# Altium PCB PCB1.PcbDoc
Units mil, origin at the board's own origin, x right, y up, seen from the top; angles counter-clockwise.
Board outline 6000 x 4000 mil, 2 copper layers (Top Layer, Bottom Layer); 32 components, 17 nets, 94 pads, 8 vias.
Unrouted connection lines stored in the file: 46.
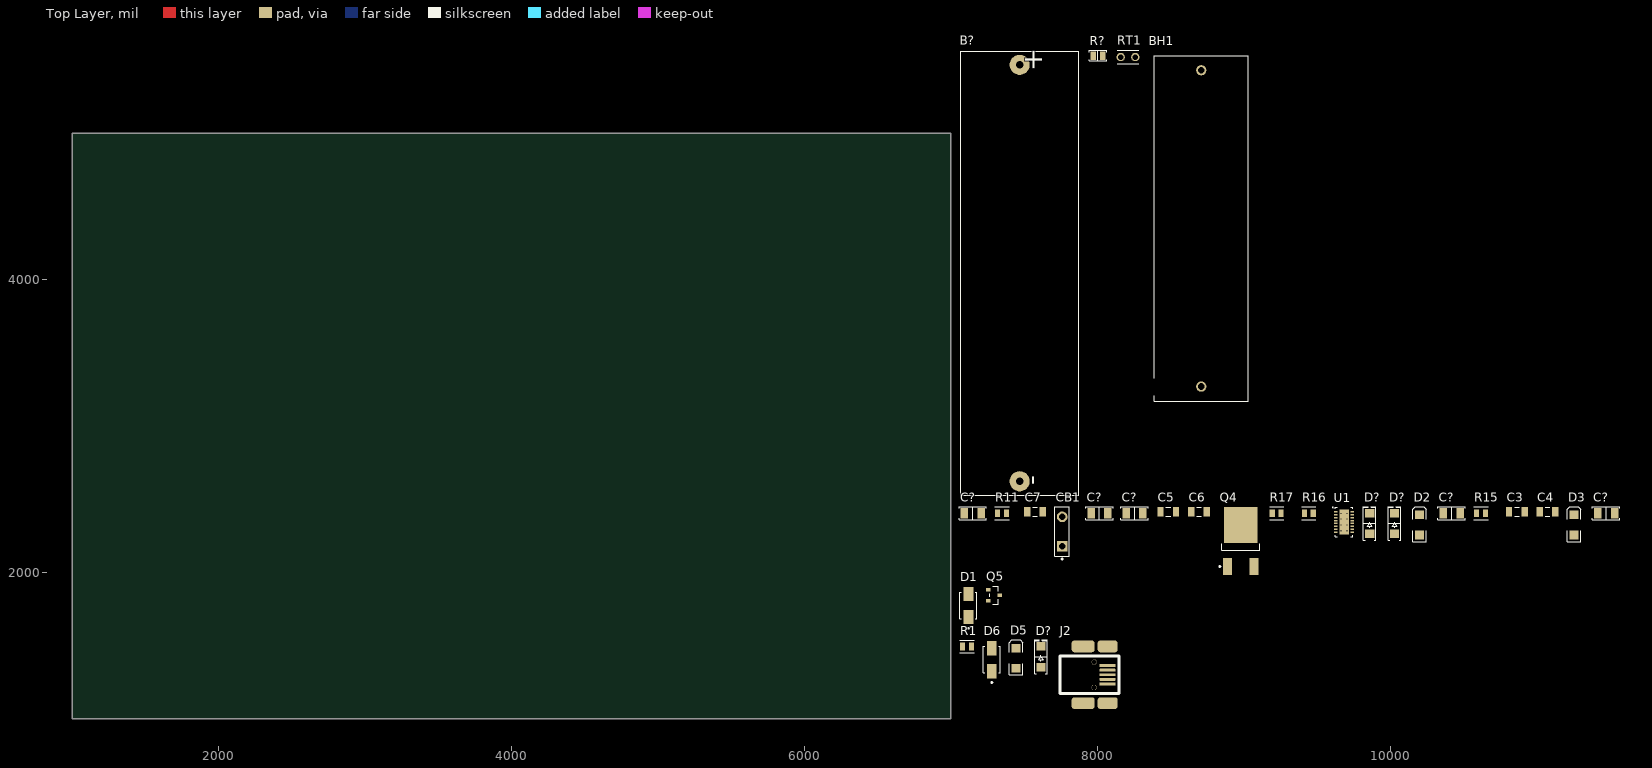
[diagram p0: Top Layer view]
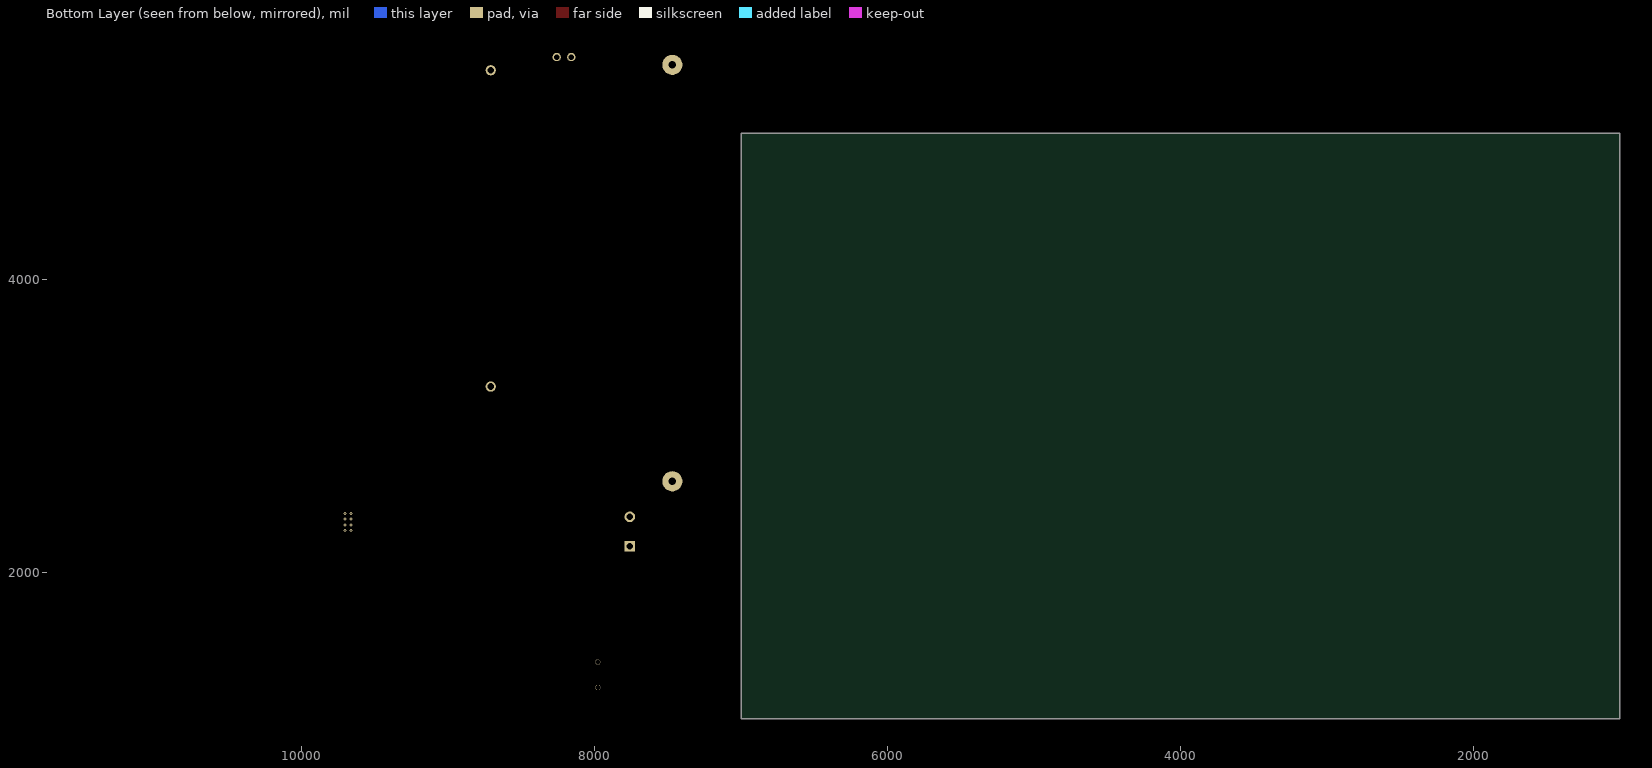
[diagram p1: Bottom Layer view, seen from below]

## Layer stack, top to bottom
Top Solder: solder mask 0.4, Solder Resist, Dk 3.5
Top Layer: signal copper 1.4
Dielectric 1: dielectric 12.6, FR-4, Dk 4.8
Bottom Layer: signal copper 1.4
Bottom Solder: solder mask 0.4, Solder Resist, Dk 3.5

## Board outline
1000,1000 7000,1000 7000,5000 1000,5000

## Design rules (kind name [scope] priority, off if disabled: settings)
Clearance [All] p1: gap=10 ignorepadtopadclearanceinfootprint=FALSE except(0: Arc-Hole Track-Hole SMDPad-Hole THPad-Hole Via-Hole Fill-Hole Poly-Hole Region-Hole Text-Hole)
PolygonConnect [All] p1: connectstyle=Relief reliefconductorwidth=10 reliefentries=4 polygonreliefangle="90 Angle" airgapwidth=10
RoomDefinition Блок4 [InComponentClass('Блок4')] p1: confinementstyle=ConfineIn formatcopy=TRUE lockcomponents=FALSE outline 0,0 2000,0 2000,1000 0,1000
RoomDefinition Блок3 [InComponentClass('Блок3')] p2: confinementstyle=ConfineIn formatcopy=TRUE lockcomponents=FALSE outline 0,0 2000,0 2000,1000 0,1000
RoomDefinition Блок2 [InComponentClass('Блок2')] p3: confinementstyle=ConfineIn formatcopy=TRUE lockcomponents=FALSE outline 0,0 2000,0 2000,1000 0,1000
RoomDefinition Блок1 [InComponentClass('Блок1')] p4: confinementstyle=ConfineIn formatcopy=TRUE lockcomponents=FALSE outline 0,0 2000,0 2000,1000 0,1000
RoutingVias [All] p1: holewidth=28 width=50 viastyle="Through Hole" minholewidth=28 minwidth=50 maxholewidth=28 maxwidth=50
SolderMaskExpansion [All] p1: expansion=4 istentingtop=FALSE
Width [All] p1: maxlimit=10 minlimit=10 preferedwidth=10
30 further rules are at their usual default settings.

## Classes and differential pairs
component class Блок4: B? BH1 R? RT1
component class Блок3: C3 C4 C5 C6 C7 C? CB1 D2 D3 D? Q4 R11 R15 R16 R17 U1
component class Блок2: D1 PTC1 Q5
component class Блок1: D5 D6 D? J2 R1

## Components (designator, comment, footprint, x,y, rotation, side; value= is the part's Value field where it differs from the comment)
B? "1043" "KEYSTONE 1043" 7470,4045 r90 top
BH1 "1028" 1028 8710,3270 r90 top
C3 "Cap Semi" C1206 10865,2415 r0 top value=1uF
C4 "Cap Semi" C1206 11075,2415 r0 top value=1uF
C5 "Cap Semi" C1206 8485,2415 r0 top value=10uF
C6 "Cap Semi" C1206 8695,2415 r0 top value=10uF
C7 "Cap Semi" C1206 7575,2415 r0 top value=560pF
C? "1µF" "CAP 1206_3216 - 1.2MM" 11475,2405 r0 top
C? "560pF" "CAP 1206_3216 - 0.8MM" 7150,2405 r0 top
C? "10µF" "CAP 1206_3216 - 1.0MM" 8255,2405 r0 top
C? "1µF" "CAP 1206_3216 - 1.2MM" 10420,2405 r0 top
C? "10µF" "CAP 1206_3216 - 1.0MM" 8015,2405 r0 top
CB1 "Circuit Breaker" SPST-2 7760,2280 r90 top
D1 "SMAJ9.0A-13-F" FP-SMA-MFG 7120,1775 r90 top
D2 "LED2" 3.2X1.6X1.1 10200,2325 r90 top
D3 "LED2" 3.2X1.6X1.1 11255,2325 r90 top
D5 "LED2" 3.2X1.6X1.1 7445,1415 r90 top
D6 "SMAJ9.0A-13-F" FP-SMA-MFG 7280,1405 r90 top
D? "Green" "LED 1206_3216 GREEN" 7615,1425 r90 top
D? "Blue" "LED 1206_3216 BLUE" 9860,2335 r90 top
D? "Yellow" "LED 1206_3216 YELLOW" 10030,2335 r90 top
J2 "67503-1020" MOLX-67503-1020_V 8070,1365 r0 top
Q4 "MJD210T4G" ONSC-DPAK-3-369C-01_V 8980,2215 r90 top
Q5 "SI2333CDS-T1-GE3" FP-S-03946-MFG 7295,1845 r0 top
R1 "MC01W0805110K" FP-MC01W0805-IPC_C 7110,1495 r0 top
R11 "MC01W0805110K" FP-MC01W0805-IPC_C 7350,2405 r0 top
R15 "MC01W0805110K" FP-MC01W0805-IPC_C 10620,2405 r0 top
R16 "MC01W0805110K" FP-MC01W0805-IPC_C 9445,2405 r0 top
R17 "MC01W0805110K" FP-MC01W0805-IPC_C 9225,2405 r0 top
R? "10k" "NTC 0805_2012" 8005,5530 r0 top
RT1 "103AT-2" SEMI-103AT-2_V 8210,5520 r0 top
U1 "LTC4060EDHC#PBF" LT-DHC-16_V 9685,2345 r0 top

## Footprints (in the part's own frame and the unit in brackets; to place one, negate y for a bottom-side part, rotate by r counter-clockwise, add the part's x,y. Pads: shape width x height; smd on the part's side, far side on the other; paste and mask are expansions set on the pad)
3.2X1.6X1.1 [mm] "SMT LED; 2 Flat Leads"
  rect 1.5x1.5 smd: 1(-1.75,0) 2(1.75,0)
  silkscreen extent -2.9,-1.15 3.2,1.15
1028 [mm]
  round 1.785 hole 1.19: 1(0,0) 2(54.86,0)
  round 1.19 hole 2.38 unplated: 3(0,7.09)
  silkscreen extent -2.54,-8.13 57.4,8.13, body extent -1.71,-8.25 57.21,8.26, height 20.12
C1206 [mm] "Chip Capacitor, Body 3.2x1.6mm, IPC High Density"
  rect 1.1x1.7 smd: 1(-1.35,0) 2(1.35,0)
  silkscreen extent -0.4,-0.75 0.4,0.75, body extent -1.7,-0.9 1.7,0.9, height 1.3
"CAP 1206_3216 - 0.8MM" [mm] "Chip Capacitor, 2-Leads, Body 3.25x1.60mm, IPC Medium Density"
  rect 1.3x1.8 smd: 1(-1.45,0) 2(1.45,0)
  silkscreen extent -2.37,-1.12 2.37,1.12, body extent -1.6,-0.8 1.6,0.8, height 0.8
"CAP 1206_3216 - 1.0MM" [mm] "Chip Capacitor, 2-Leads, Body 3.25x1.60mm, IPC Medium Density"
  rect 1.3x1.8 smd: 1(-1.45,0) 2(1.45,0)
  silkscreen extent -2.37,-1.12 2.37,1.12, body extent -1.6,-0.8 1.6,0.8, height 1
"CAP 1206_3216 - 1.2MM" [mm] "Chip Capacitor, 2-Leads, Body 3.25x1.60mm, IPC Medium Density"
  rect 1.3x1.8 smd: 1(-1.45,0) 2(1.45,0)
  silkscreen extent -2.37,-1.12 2.37,1.12, body extent -1.6,-0.8 1.6,0.8, height 1.2
FP-MC01W0805-IPC_C [mil]
  rect 35.67x51.8 smd paste+0 mask+0: 1(-30.55,0) 2(30.55,0)
  silkscreen extent -48,-43 48,43, body extent -52,-31 52,31, height 10
FP-S-03946-MFG [mil]
  rect 29x22 smd paste+0 mask+0: 1(-39,37.5) 2(-39,-37.5) 3(39,0)
  silkscreen extent -28,-60 28,60, body extent -57,-64 57,64, height 10
FP-SMA-MFG [mm]
  rect 2.5x1.7 smd paste+0 mask+0: 1(-2,0) 2(2,0)
  silkscreen extent -4.07,-1.46 2.3,1.46, body extent -3.35,-1.56 3.35,1.56, height 0.25
"KEYSTONE 1043" [mm]
  round 3.5 hole 1.32 unplated: 1(36.11,0) 2(-36.11,0)
  rect 0x0 hole 3.55 unplated: M(-27.6,-7.87) M(27.6,7.87)
  rect 0x0 hole 2.39 unplated: M(36.11,-7.87)
  silkscreen extent -38.5,-10.25 38.5,10.25, body extent -38.53,-10.32 38.53,10.33, height 14.86
"LED 1206_3216 BLUE" [mm] "Chip Diode, 2-Leads, Body 3.13x1.55mm, IPC Medium Density"
  rect 1.5x1.6 smd: 1(-1.8,0) 2(1.8,0)
  silkscreen extent -2.92,-1.1 2.92,1.1, body extent -1.6,-0.8 1.6,0.8, height 0.9
"LED 1206_3216 GREEN" [mm] "Chip Diode, 2-Leads, Body 3.13x1.55mm, IPC Medium Density"
  rect 1.5x1.6 smd: 1(-1.8,0) 2(1.8,0)
  silkscreen extent -2.92,-1.1 2.92,1.1, body extent -1.6,-0.8 1.6,0.8, height 0.9
"LED 1206_3216 YELLOW" [mm] "Chip Diode, 2-Leads, Body 3.13x1.55mm, IPC Medium Density"
  rect 1.5x1.6 smd: 1(-1.8,0) 2(1.8,0)
  silkscreen extent -2.92,-1.1 2.92,1.1, body extent -1.6,-0.8 1.6,0.8, height 0.9
LT-DHC-16_V [mm] "SON, 16-Leads, Body 5x3mm, Pitch 0.5mm, Thermal Pad 4.4X1.65mm"
  rect 0.65x0.25 smd: 1(-1.425,1.75) 2(-1.425,1.25) 3(-1.425,0.75) 4(-1.425,0.25) 5(-1.425,-0.25) 6(-1.425,-0.75) 7(-1.425,-1.25) 8(-1.425,-1.75) 9(1.425,-1.75) 10(1.425,-1.25) 11(1.425,-0.75) 12(1.425,-0.25) 13(1.425,0.25) 14(1.425,0.75) 15(1.425,1.25) 16(1.425,1.75)
  rect 1.65x4.4 smd: 17(0,0)
  silkscreen extent -2,-2.55 1.55,2.6, body extent -1.5,-2.5 1.5,2.5, height 0.8
MOLX-67503-1020_V [mm] "Mini USB Connector, SMT, Righer Angle"
  rrect50% 2.8x0.5 smd: 1(0,0) 2(0,-0.8) 3(0,-1.6) 4(0,-2.4) 5(0,-3.2)
  rrect50% 3.5x2.05 smd: 6(0.025,3.325) 8(0.025,-6.525)
  rrect50% 4x2.05 smd: 7(-4.225,3.325) 9(-4.225,-6.525)
  round 0.9 hole 0.9 unplated: X(-2.325,-3.8) Y(-2.325,0.6)
  silkscreen extent -8.25,-4.85 2,1.65, body extent -8.22,-6.56 0.78,3.34, height 3.95
"NTC 0805_2012" [mm] "Chip Thermistor, 2-Leads, Body 2.00x1.25mm, IPC Medium Density"
  rect 1x1.45 smd: 1(-0.825,0) 2(0.825,0)
  silkscreen extent -1.5,-0.9 1.5,0.9, body extent -1,-0.64 1,0.64, height 1.27
ONSC-DPAK-3-369C-01_V [mm] "DPAK, 3-Leads, Body 6.54x6.095mm, Pitch 2.29mm"
  rect 3x1.6 smd: 1(-4.4,2.29) 3(-4.4,-2.29)
  rect 6.2x5.8 smd: 4(2.8,0)
  silkscreen extent -4.52,-3.27 -0.45,3.76, body extent -1.6,-3.27 4.49,3.27, height 2.38
SEMI-103AT-2_V [mm] "THD, 2-Leads, Body Width 3.8mm (Max), Pitch 2.54mm"
  round 1.45 hole 0.95: 1(-1.27,0) 2(1.27,0)
  silkscreen extent -1.9,-1.2 1.9,1.2, body extent -1.9,-1.2 1.9,1.2, height 9.5
SPST-2 [mm] "Switch; 2 Leads"
  rect 1.85x1.85 hole 1.1: 1(-2.54,0)
  round 1.85 hole 1.1: 2(2.54,0)
  silkscreen extent -4.89,-1.27 4.28,1.27

## Part data
B?: "BATTERY HOLDER 18650 PC PIN", Manufacturer="Keystone Electronics", Operating Temperature="-50°C ~ 145°C", Supplier Part Number 1=36-1043-ND, Battery Cell Size=18650, Battery Type, Function="Cylindrical, Holder", ComponentLink1Description=Datasheet, ComponentLink1URL=http://keyelco.com/userAssets/file/M65p27.pdf, ComponentLink2Description="DigiKey Link", ComponentLink2URL=http://digikey.com/product-detail/en/keystone-electronics/1043/36-1043-ND/2745669, Height Above Board="0.585\" (14.86mm)", LastUpdated="02.02.2020 9:19:56", Lifecycle Status=Active, Minimum Order=1, Mounting Type="PCB, Through Hole", Number of Cells=1, Packaging=Unknown, Part Number=1043, Part Status=Active, PartId=2, Price=2.58, Series=-, Style="Holder (Open)", Supplier 1=DigiKey, Termination Style="PC Pin"
BH1: "Undefined or Miscellaneous", Manufacturer_Name="Keystone Electronics", Mouser Part Number=534-1028, Arrow Part Number=1028, Arrow Price/Stock=https://www.arrow.com/en/products/1028/keystone-electronics, Datasheet Link=http://www.keyelco.com/product-pdf.cfm?p=929, Height=15.49mm, Manufacturer_Part_Number=1028, Mouser Price/Stock=https://www.mouser.co.uk/ProductDetail/Keystone-Electronics/1028?qs=TMDrOSIpnUdoTBwO9TubhA%3D%3D
C3 C4 C5 C6 C7: "Capacitor (Semiconductor SIM Model)", LatestRevisionDate=29-May-2009, LatestRevisionNote="IPC-7351 Footprint Added.", PackageDescription="Chip Capacitor", PackageReference=C1206, Published=8-Jun-2000, Publisher="Altium Limited"
C? C?: library part C1206C105M5RACTU, "CAP CER 1UF 50V X7R 1206", Device Package="1206 (3216 Metric)", Manufacturer=KEMET, Operating Temperature="-55°C ~ 125°C", Supplier Part Number 1=399-8151-1-ND, Temperature Coefficient=X7R, Tolerance=±20%, Voltage - Rated=50V, Applications="Bypass, Decoupling", Capacitance=1µF, ComponentLink1Description=Datasheet, ComponentLink1URL=https://api.kemet.com/component-edge/download/datasheet/C1206C105M5RACTU.pdf, ComponentLink2Description="DigiKey Link", ComponentLink2URL=http://digikey.com/product-detail/en/kemet/C1206C105M5RACTU/399-8151-1-ND/3471874, LastUpdated="02.09.2020 1:05:10", Lifecycle Status=Active, Minimum Order=1, Mounting Type="Surface Mount, MLCC", Package / Case="1206 (3216 Metric)", Packaging=TapeAndReel, Part Number=C1206C105M5RACTU, Part Status=Active, PartId=18886, Price=0.07, Series="SMD Comm X7R", Size / Dimension="0.126\" L x 0.063\" W (3.20mm x 1.60mm)", Supplier 1=DigiKey, Thickness (Max)="0.043\" (1.10mm)"
C?: library part CC1206JRNPO9BN561, "CAP CER 560PF 50V NPO 1206", Device Package="1206 (3216 Metric)", Manufacturer=Yageo, Operating Temperature="-55°C ~ 125°C", Supplier Part Number 1=311-4422-1-ND, Temperature Coefficient="C0G, NP0", Tolerance=±5%, Voltage - Rated=50V, Applications="General Purpose", Capacitance=560pF, ComponentLink1Description=Datasheet, ComponentLink1URL=https://www.yageo.com/upload/media/product/productsearch/datasheet/mlcc/UPY-GP_NP0_16V-to-50V_17.pdf, ComponentLink2Description="DigiKey Link", ComponentLink2URL=http://digikey.com/product-detail/en/yageo/CC1206JRNPO9BN561/311-4422-1-ND/8025511, LastUpdated="02.09.2020 1:04:45", Lifecycle Status=Active, Minimum Order=1, Mounting Type="Surface Mount, MLCC", Package / Case="1206 (3216 Metric)", Packaging=TapeAndReel, Part Number=CC1206JRNPO9BN561, Part Status=Active, PartId=18850, Price=0.05, Series=CC, Size / Dimension="0.126\" L x 0.063\" W (3.20mm x 1.60mm)", Supplier 1=DigiKey, Thickness (Max)="0.028\" (0.70mm)"
C? C?: library part EMK316BJ106MD-T, "CAP CER 10UF 16V X5R 1206", Device Package="1206 (3216 Metric)", Manufacturer="Taiyo Yuden", Operating Temperature="-55°C ~ 85°C", Supplier Part Number 1=587-4881-1-ND, Temperature Coefficient=X5R, Tolerance=±20%, Voltage - Rated=16V, Applications="General Purpose", Capacitance=10µF, ComponentLink1Description=Datasheet, ComponentLink1URL=http://www.yuden.co.jp/productdata/catalog/mlcc06_e.pdf, ComponentLink2Description="DigiKey Link", ComponentLink2URL=http://digikey.com/product-detail/en/taiyo-yuden/EMK316BJ106MD-T/587-4881-1-ND/6563724, LastUpdated="02.09.2020 1:05:06", Lifecycle Status=Active, Minimum Order=1, Mounting Type="Surface Mount, MLCC", Package / Case="1206 (3216 Metric)", Packaging=TapeAndReel, Part Number=EMK316BJ106MD-T, Part Status=Active, PartId=18996, Price=0.05, Series=M, Size / Dimension="0.126\" L x 0.063\" W (3.20mm x 1.60mm)", Supplier 1=DigiKey, Thickness (Max)="0.037\" (0.95mm)"
D1 D6: library part CMP-12828-000014-1, "TVS DIODE 9V 15.4V SMA", Breakdown Voltage=10V, Clamping Voltage=15.4V, lcsc.com=имеется, Manufacturer="Diodes Inc", Max Junction Temp=+150°C, Package=SMA, Peak Pulse Current=26A, Peak Pulse Power=400W, Reverse Standoff Voltage=9V, Temperature="-55°C to +150°C", Temperature Range Low=-55°C, Automotive=No, Category=Diode, ComponentLink2Description=Datasheet, ComponentLink2URL=https://www.diodes.com/assets/Datasheets/ds19005.pdf, Device Class L1="Circuit Protection", Device Class L2="TVS Diodes", Device Class L3=unset, Digikey Description="TVS DIODE 9V 15.4V SMA", Direction=Unidirectional, Footprint Url=https://www.diodes.com/assets/Package-Files/SMA.pdf, Height=2.4mm, lcsc.com link=https://lcsc.com/product-detail/TVS_Diodes-Incorporated-SMAJ9-0CA-13-F_C135023.html, Lead Free=Yes, Manufacturer Part Number=SMAJ9.0A-13-F, Mouser Description="TVS Diodes - Transient Voltage Suppressors 400W 9.0V", Number Of Channels=1, Octopart=https://octopart.com/smaj9.0a-13-f-diodes+inc.-350369, RoHS=TRUE, Standoff Height=0.05mm, Temperature Range High=+150°C
D2 D3 D5: "Typical RED, GREEN, YELLOW, AMBER GaAs LED", LatestRevisionDate=17-Jul-2002, LatestRevisionNote="Re-released for DXP Platform.", PackageDescription="SM LED; 2 Flat Leads", PackageReference=3.2X1.6X1.1, PackageVersion=Feb-2002, Published=8-Jun-2000, Publisher="Altium Limited"
  D2: Parameter 1="Идет заряд аккумулятора"
  D3: Parameter 1="Питание находится в норме"
  D5: Parameter 1="Подано питание в разъем"
D?: library part SML-LX1206SUGC-TR, "LED GREEN CLEAR 1206 SMD", Current - Test=20mA, Device Package="1206 (3216 Metric)", Lens Color=Colorless, Manufacturer="Lumex Opto/Components Inc.", Millicandela Rating=45mcd, Supplier Device Package=1206, Supplier Part Number 1=67-1698-1-ND, Voltage - Forward (Vf) (Typ)=2.2V, Color=Green, ComponentLink1Description=Datasheet, ComponentLink1URL=https://www.lumex.com/content/files/ProductAttachment/SML-LX1206SUGC-TR.pdf, ComponentLink2Description="DigiKey Link", ComponentLink2URL=http://digikey.com/product-detail/en/lumex-opto-components-inc/SML-LX1206SUGC-TR/67-1698-1-ND/467582, Configuration=Standard, Height (Max)=1.10mm, LastUpdated="02.09.2020 1:20:47", Lens Size="2.00mm x 1.50mm", Lens Style="Rectangle with Flat Top", Lens Transparency=Clear, Lifecycle Status=Active, Minimum Order=1, Mounting Type="Surface Mount", Package / Case="1206 (3216 Metric)", Packaging=TapeAndReel, Part Number=SML-LX1206SUGC-TR, Part Status=Active, PartId=530, Price=0.09, Series=-, Size / Dimension="3.20mm L x 1.60mm W", Supplier 1=DigiKey, Viewing Angle=140°, Wavelength - Peak=574nm
D?: library part IN-S126ATB, "LED BLUE CLEAR 1206 SMD", Current - Test=20mA, Device Package="1206 (3216 Metric)", Lens Color=Clear, Manufacturer=Inolux, Millicandela Rating=140mcd, Supplier Device Package=1206, Supplier Part Number 1=1830-1088-1-ND, Voltage - Forward (Vf) (Typ)=3.2V, Color=Blue, ComponentLink1Description=Datasheet, ComponentLink1URL=http://www.inolux-corp.com/datasheet/SMDLED/Mono%20Color%20Top%20View/IN-S126AT%20Series_V1.0.pdf, ComponentLink2Description="DigiKey Link", ComponentLink2URL=http://digikey.com/product-detail/en/inolux/IN-S126ATB/1830-1088-1-ND/7604680, Configuration=Standard, Height (Max)=1.10mm, LastUpdated="02.09.2020 1:20:34", Lens Size="2.00mm x 1.50mm", Lens Style="Rectangle with Flat Top", Lens Transparency=Clear, Lifecycle Status=Active, Minimum Order=1, Mounting Type="Surface Mount", Package / Case="1206 (3216 Metric)", Packaging=TapeAndReel, Part Number=IN-S126ATB, Part Status=Active, PartId=723, Price=0.07, Series=IN-S126AT, Size / Dimension="3.20mm L x 1.50mm W", Supplier 1=DigiKey, Viewing Angle=120°, Wavelength - Dominant=468nm, Wavelength - Peak=472nm
D?: library part APTD3216SYCK, "LED YELLOW CLEAR 2SMD", Current - Test=20mA, Device Package="1206 (3216 Metric)", Lens Color=Colorless, Manufacturer=Kingbright, Millicandela Rating=800mcd, Supplier Device Package=2-SMD, Supplier Part Number 1=754-1160-1-ND, Voltage - Forward (Vf) (Typ)=2V, Color=Yellow, ComponentLink1Description=Datasheet, ComponentLink1URL=http://www.kingbrightusa.com/images/catalog/SPEC/APTD3216SYCK.pdf, ComponentLink2Description="DigiKey Link", ComponentLink2URL=http://digikey.com/product-detail/en/kingbright/APTD3216SYCK/754-1160-1-ND/1747877, Configuration=Standard, Height (Max)=1.90mm, LastUpdated="02.09.2020 1:21:25", Lens Size="1.60mm Dia", Lens Style="Round with Domed Top", Lens Transparency=Clear, Lifecycle Status=Active, Minimum Order=1, Mounting Type="Surface Mount", Package / Case="1206 (3216 Metric)", Packaging=TapeAndReel, Part Number=APTD3216SYCK, Part Status=Active, PartId=38, Price=0.10, Series=-, Size / Dimension="3.20mm L x 1.60mm W", Supplier 1=DigiKey, Viewing Angle=35°, Wavelength - Dominant=590nm, Wavelength - Peak=590nm
J2: library part CMP-0411-00002-1, "USB, MINI, SMD, RA KME04-USBMU03A01", lcsc.com=имеется, Manufacturer=Molex, ComponentLink1Description="Manufacturer URL", ComponentLink1URL=http://www.molex.com/, ComponentLink2Description=Datasheet, ComponentLink2URL=http://www.molex.com/pdm_docs/sd/675031020_sd.pdf, DatasheetVersion="Rev F, 06/2009", lcsc.com/product=https://lcsc.com/product-detail/USB-Connectors_MOLEX-675031020_C136451.html, Mounting Technology="Surface Mount", PackageDescription="Mini USB Connector, SMT, Righer Angle", PackageReference=67503-1020, PartNumber=67503-1020, Terminal Pitch="0.8 mm"
Q4: library part CMP-1048-00154-1, "Complementary Plastic Power Transistor, PNP Silicon, 3-Pin DPAK, Pb-Free, Tape and Reel", Manufacturer="On Semiconductor", ComponentLink1Description="Manufacturer URL", ComponentLink1URL=http://www.onsemi.com/, ComponentLink2Description=Datasheet, ComponentLink2URL=http://www.onsemi.cn/pub_link/Collateral/MJD200-D.PDF, ComponentLink3Description="Package Specification", ComponentLink3URL=http://www.onsemi.cn/pub_link/Collateral/369C.PDF, DatasheetVersion="Rev. 13", fT Min (MHz)=65, IC Continuous (A)=5, Mounting Technology="Surface Mount", PackageDescription="3-Pin Flange Mount, Body 6.54 x 6.095 mm, Pitch 2.29 mm", PackageReference=DPAK-3-369C-01, PackageVersion="Rev. E, 02/2014", Packing="Tape and Reel", PartNumber=MJD210T4G, Polarity=PNP, RoHS=TRUE
Q5: library part CMP-02550-000209-1, "MOSFET P-CH 12V 7.1A SOT-23", Continuous Drain Current=-5.1A, Drain To Source Breakdown Voltage=-12V, Drain To Source Resistance=0.0285Ω, Gate To Source Voltage=8V, Input Capacitace At Vds="1225pF @ -6V", lcsc.com=имеется, Manufacturer=Vishay, Max Forward Diode Voltage=-1.2V, Max Junction Temp=+150°C, Package=S-03946, Power Dissipation=1.25W, Pulse Drain Current=-20A, Temperature="-55°C to +150°C", Temperature Range Low=-55°C, Typ Forward Diode Voltage=-0.7V, Automotive=No, Category=Trans, ComponentLink2Description=Datasheet, ComponentLink2URL=http://www.vishay.com/docs/68717/si2333cd.pdf, Depletion Mode=False, Device Class L1="Discrete Semiconductors", Device Class L2=Transistors, Device Class L3=MOSFETs, Digikey Description="MOSFET P-CH 12V 7.1A SOT-23", Drain To Source Voltage=-12V, Gate Charge At Vgs="15nC @ -4.5V", Height=1.12mm, Ipc Land Pattern Name=SOT95P237X100-3, lcsc.com link=https://lcsc.com/product-detail/MOSFETs_Vishay-Intertech-SI2333CDS-T1-GE3_C48179.html, Lead Free=Yes, Manufacturer Part Number=SI2333CDS-T1-GE3, Mouser Description="MOSFET 12V 5.1A 2.5W 35 mohms @ 4.5V", Number Of Channels=1, Number Of P Channels=1, Octopart=https://octopart.com/si2333cds-t1-ge3-vishay-43171447, Reverse Recovery Charge=20nC, Reverse Recovery Time=32ns, RoHS=TRUE, Rthja Max=75°C/W, Standoff Height=0.01mm, Temperature Range High=+150°C, Threshold Vgs Max=-1V, Threshold Vgs Min=-0.4V, Transconductance=18.5S, Turn Off Delay Time=45ns, Turn On Delay Time=13ns
R1 R16 R17: library part CMP-12256-000003-1, "Resistor, 10K, 0.1W, 1%, 0805, Reel", Case Code (Imperial)=0805, Case Code (Metric)=2012, Manufacturer=Multicomp, Max Operating Temperature=155°C, Min Operating Temperature=-55°C, Power Rating=100mW, Resistance=2kR, Resistance Tolerance=1%, Resistor Type="Thick Film", Supplier Part Number 1=07W5303, Temperature Coefficient=100ppm/°C, Voltage Rating=150V, Case/Package=0805, Category="Chip SMD Resistors", ComponentLink1Description=https://datasheet.ciiva.com/7881/1729047-7881334.pdf?src-supplier=Element14, ComponentLink1URL=https://datasheet.ciiva.com/7881/1729047-7881334.pdf?src-supplier=Element14, ComponentLink2Description=https://datasheet.ciiva.com/7881/1729047-7881333.pdf?src-supplier=Element14, ComponentLink2URL=https://datasheet.ciiva.com/7881/1729047-7881333.pdf?src-supplier=Element14, Composition="Thick Film", Manufacturer Part Number=MC01W0805110K, Number of Pins=2, Packaging="Cut Tape", Pricing 1="1=0,00900, 5000=0,00900, 10000=0,00800, 25000=0,00600 (USD)", REACH SVHC="No SVHC", RoHS=No, RoHS Compliant=No, Series=MC, Stock 1=940000, Supplier 1=Newark, Tolerance=1%, Voltage Rating (DC)=150V, Width=1.25mm
R11: library part CMP-12256-000003-1, "Resistor, 10K, 0.1W, 1%, 0805, Reel", Case Code (Imperial)=0805, Case Code (Metric)=2012, Manufacturer=Multicomp, Max Operating Temperature=155°C, Min Operating Temperature=-55°C, Power Rating=100mW, Resistance=2kR=0.7A, Resistance Tolerance=1%, Resistor Type="Thick Film", Supplier Part Number 1=07W5303, Temperature Coefficient=100ppm/°C, Voltage Rating=150V, Case/Package=0805, Category="Chip SMD Resistors", ComponentLink1Description=https://datasheet.ciiva.com/7881/1729047-7881334.pdf?src-supplier=Element14, ComponentLink1URL=https://datasheet.ciiva.com/7881/1729047-7881334.pdf?src-supplier=Element14, ComponentLink2Description=https://datasheet.ciiva.com/7881/1729047-7881333.pdf?src-supplier=Element14, ComponentLink2URL=https://datasheet.ciiva.com/7881/1729047-7881333.pdf?src-supplier=Element14, Composition="Thick Film", Manufacturer Part Number=MC01W0805110K, Number of Pins=2, Packaging="Cut Tape", Pricing 1="1=0,00900, 5000=0,00900, 10000=0,00800, 25000=0,00600 (USD)", REACH SVHC="No SVHC", RoHS=No, RoHS Compliant=No, Series=MC, Stock 1=940000, Supplier 1=Newark, Tolerance=1%, Voltage Rating (DC)=150V, Width=1.25mm
R15: library part CMP-12256-000003-1, "Resistor, 10K, 0.1W, 1%, 0805, Reel", Case Code (Imperial)=0805, Case Code (Metric)=2012, Manufacturer=Multicomp, Max Operating Temperature=155°C, Min Operating Temperature=-55°C, Power Rating=100mW, Resistance=4.42kR, Resistance Tolerance=1%, Resistor Type="Thick Film", Supplier Part Number 1=07W5303, Temperature Coefficient=100ppm/°C, Voltage Rating=150V, Case/Package=0805, Category="Chip SMD Resistors", ComponentLink1Description=https://datasheet.ciiva.com/7881/1729047-7881334.pdf?src-supplier=Element14, ComponentLink1URL=https://datasheet.ciiva.com/7881/1729047-7881334.pdf?src-supplier=Element14, ComponentLink2Description=https://datasheet.ciiva.com/7881/1729047-7881333.pdf?src-supplier=Element14, ComponentLink2URL=https://datasheet.ciiva.com/7881/1729047-7881333.pdf?src-supplier=Element14, Composition="Thick Film", Manufacturer Part Number=MC01W0805110K, Number of Pins=2, Packaging="Cut Tape", Pricing 1="1=0,00900, 5000=0,00900, 10000=0,00800, 25000=0,00600 (USD)", REACH SVHC="No SVHC", RoHS=No, RoHS Compliant=No, Series=MC, Stock 1=940000, Supplier 1=Newark, Tolerance=1%, Voltage Rating (DC)=150V, Width=1.25mm
R?: library part KR103E0J, "THERMISTOR NTC 10KOHM 3435K 0805", Manufacturer="Littelfuse Inc.", Package / Case="0805 (2012 Metric)", Power - Max=300mW, Resistance Tolerance=±5%, Supplier Part Number 1=KR103E0J-ND, B25/85=3435K, ComponentLink1Description=Datasheet, ComponentLink1URL=https://www.littelfuse.com/~/media/electronics/datasheets/surface_mount_thermistors/littelfuse_surface_mount_thermistors_end_banded_chip_thermistors_0805_kr_datasheet.pdf.pdf, ComponentLink2Description="DigiKey Link", ComponentLink2URL=http://digikey.com/product-detail/en/littelfuse-inc/KR103E0J/KR103E0J-ND/4923947, LastUpdated="30.08.2020 21:02:56", Lifecycle Status=Active, Minimum Order=500, Mounting Type="Surface Mount", Packaging=Bulk, Part Number=KR103E0J, PartId=1290, Price=0.48, Resistance in Ohms @ 25°C=10k, Series=KR, Supplier 1=DigiKey
RT1: library part CMP-2000-05824-1, "Precision NTC Thermistor, 10 kOhm, +/- 1%, 10 mW, -50 to 110 degC, 2-Pin THD, RoHS, Bulk", Manufacturer=Semitec, Max Operating Temperature=110°C, Min Operating Temperature=-50°C, Operating Temperature Range=-50Cto+110C, Package Description="2-Pin Through Hole Device, Body Width 3.8 mm (Max), Pitch 2.54 mm", Resistance=10kOhms, Supplier Part Number 1=954-103AT-2, Tolerance=1%, Brand=Semitec, Category=Thermistors, ComponentLink1Description=https://datasheet.ciiva.com/4505/semitec-atthermistor-371460-4505142.pdf?src-supplier=Mouser, ComponentLink1URL=https://datasheet.ciiva.com/4505/semitec-atthermistor-371460-4505142.pdf?src-supplier=Mouser, ComponentLink2Description=https://datasheet.ciiva.com/26346/61-0500e-26346397.pdf?src-supplier=Rapid+Electronics, ComponentLink2URL=https://datasheet.ciiva.com/26346/61-0500e-26346397.pdf?src-supplier=Rapid+Electronics, Datasheet URL=https://www.rapidonline.com/pdf/61-0500e.pdf, Datasheet Version="Rev. A, 02/2007", Height=2.4mm, Lead Pitch=2.54mm, Lead Spacing=2.54mm, Length=17mm, Manufacturer Part Number=103AT-2, Manufacturer URL=http://www.semitec.co.jp/english/, Mounting Technology=ThroughHole, Number of Pins=2, Package Reference=103AT-2, Packaging=Bulk, Pricing 1="1=2,25000, 10=2,06000, 50=2,06000, 100=1,67000, 200=0,75000, 600=0,66000, 1000=0,42000, 2000=0,35400, 5000=0,34500, 10000=0,33500 (USD)", Product Category=Thermistors, RoHS=True, RoHS Compliant=Yes, Series=AT, Stock 1=13690, Supplier 1=Mouser, Termination=Radial, Termination Style=Radial, Type=NTC, Width=3.7mm
U1: library part CMP-0471-00160-1, "Standalone Linear NiMH / NiCd Fast Battery Charger, 4.5 to 10 V Vin, 16-pin SON (DHC-16), -40 to 85 degC, Pb-Free", Float Voltage=Adj, Manufacturer="Linear Technology", Max Charge Current(A)=2, Battery Chemistry="NiCd, NiMH, Lead Acid", Code_JEDEC=MO-229, ComponentLink1Description="Manufacturer URL", ComponentLink1URL=http://www.linear.com/, ComponentLink2Description=Datasheet, ComponentLink2URL=http://cds.linear.com/docs/en/datasheet/4060f.pdf, ComponentLink3Description="Package Specification", ComponentLink3URL=http://cds.linear.com/docs/en/packaging/DFN_16_05-08-1706.pdf, Mounting Technology="Surface Mount", Number of Cells="1 to 4", PackageDescription="16-Pin Plastic DFN, Body 5 x 3 mm, Pitch 0.5 mm", PackageReference=DHC-16, PackageVersion=Jun-10, PartNumber=LTC4060EDHC#PBF, RoHS=TRUE, Type of Charger=Linear, Vin Max(V)=10, Vin Min(V)=4.5
CB1: LatestRevisionDate=17-Jul-2002, LatestRevisionNote="Re-released for DXP Platform.", PackageDescription="Switch; 2 Leads", PackageReference=SPST-2, Published=24-Mar-1999, Publisher="Altium Limited"

## Via types
v1: diameter 19.68, hole 7.87, Top Layer to Bottom Layer, 8 vias

## Nets (pads, with @x,y where several pads share a name; then routed paths per layer and width w, separated by ;. In a path a pad name is that pad's centre, name@x,y a point inside that pad or via, vN(x,y) a via of type N, cw(c..) or ccw(c..) an arc to the next point about the centre after c; other vN are vias at no path point)
GND: BH1.2 C3.1 C4.1 C5.1 C6.1 C7.1 D1.2 D6.2 J2.5 Q5.1 R1.1 R11.2 RT1.1 U1.6 U1.9 U1.10 U1.12 U1.16 U1.17
  other v1: 9665.31,2285.94 9704.68,2285.94 9665.31,2325.31 9704.68,2325.31 9665.31,2364.68 9704.68,2364.68 9665.31,2404.06 9704.68,2404.06
NetBH1_1: BH1.1 C5.2 C6.2 Q4.4 U1.2
NetC3_2: C3.2 C4.2 D2.1 D3.1 R15.1 U1.5 U1.8 U1.14
NetC7_2: C7.2 U1.4
NetD1_1: D1.1 Q5.2
NetD2_2: D2.2 R17.1
NetD3_2: D3.2 R16.2
NetD5_1: D5.1 J2.1
NetD5_2: D5.2 R1.2
NetD6_1: D6.1 J2.6 J2.7 J2.8 J2.9
NetPTC1_2: Q5.3
NetQ4_1: Q4.1 U1.1
NetQ4_3: Q4.3 U1.3
NetR11_1: R11.1 U1.7
NetR15_2: R15.2 RT1.2 U1.11
NetR16_1: R16.1 U1.13
NetR17_2: R17.2 U1.15
pads on no net: B?.1 B?.2 B?.M BH1.3 C?.1 C?.2 CB1.1 CB1.2 D?.1 D?.2 J2.2 J2.3 J2.4 J2.X J2.Y R?.1 R?.2

## Text inside footprints (layer, text, board x,y; h text height)
B?: Top Overlay "+" at 7672.76,5422.95 h236.22 r90; Top Overlay "-" at 7660.94,2596.18 h236.22 r90